# EAGLE board ESPCAT (EAGLE 8.0.1)
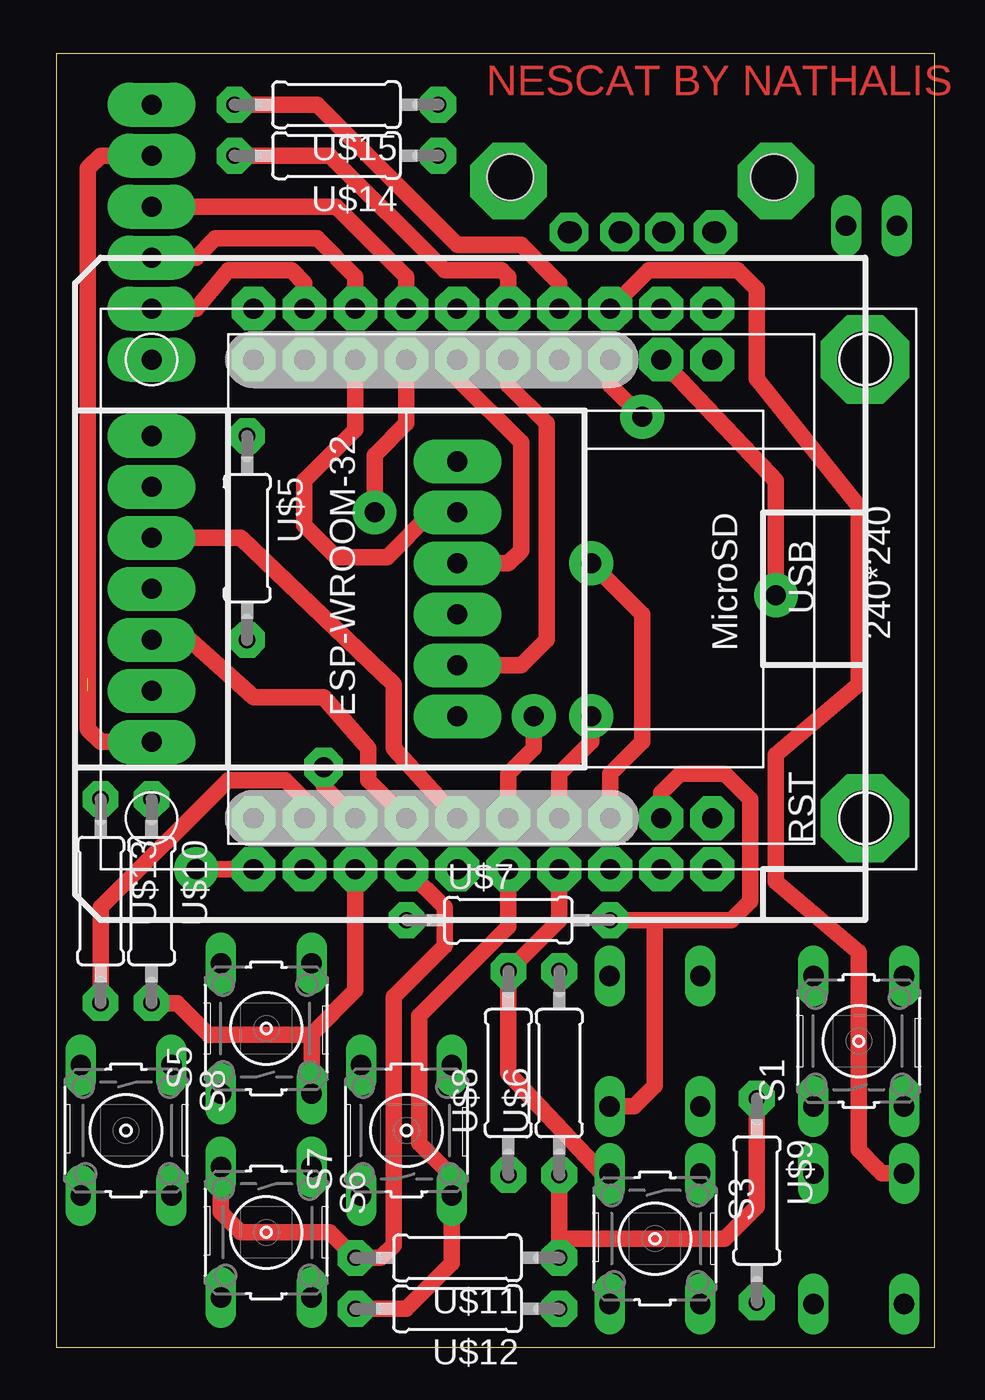
[diagram p0: board, top side]
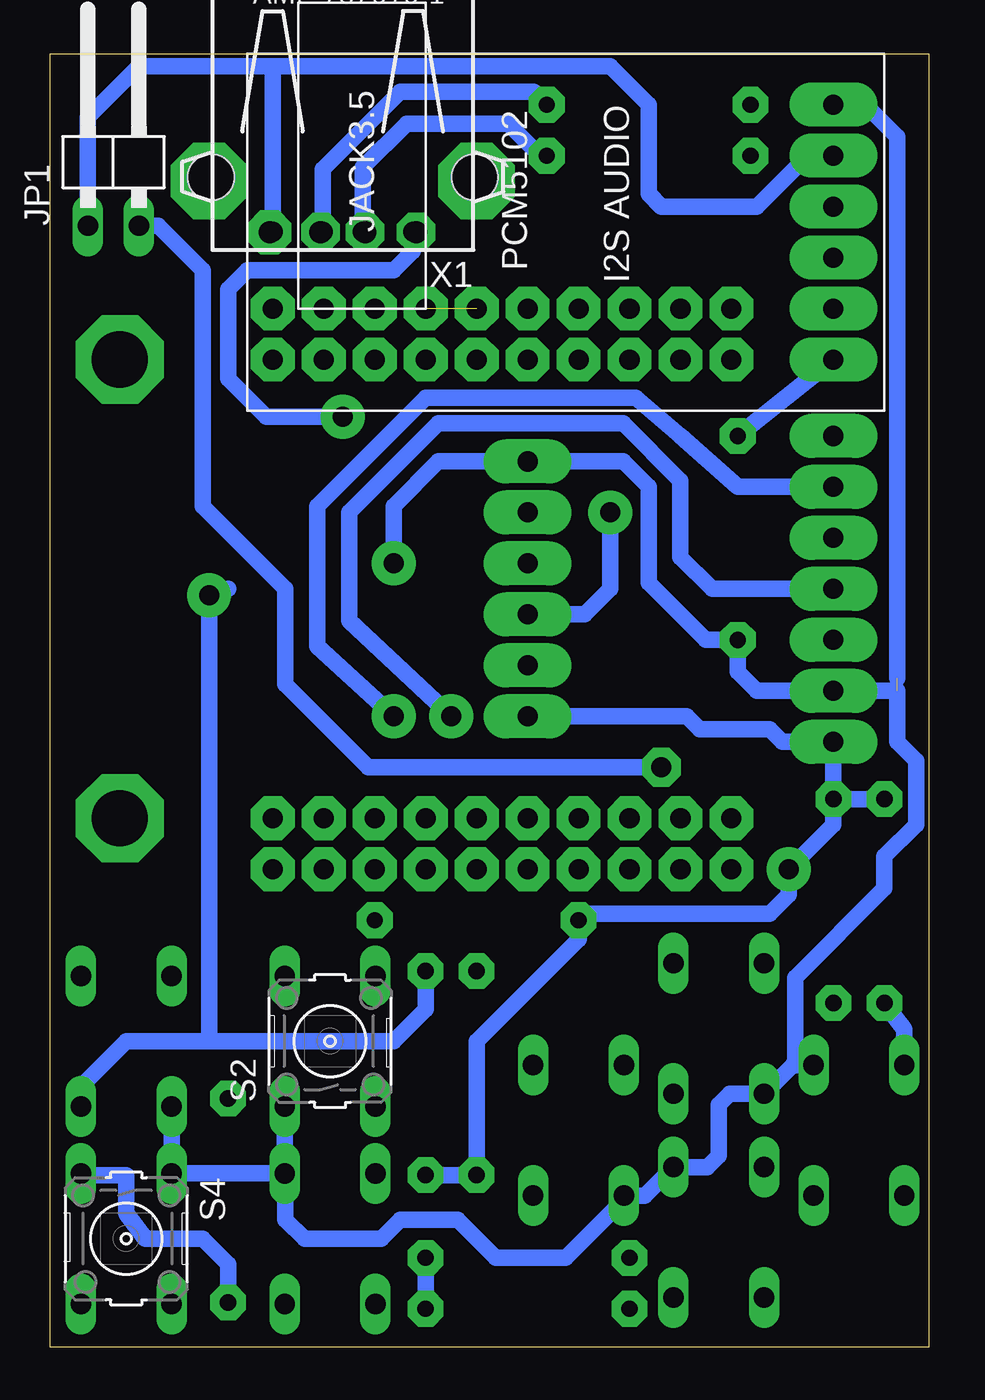
[diagram p1: board, bottom side, seen from below]

Size 43.8 x 64.44 mm. Coordinates in mm from the lower left corner, seen from the top.
Outline: 0,0 43.8,0 43.8,64.44 0,64.44 0,0
Copper layers (1*16): Top 0.035mm / dielectric 1.5mm / Bottom 0.035mm
Design rules "default": minimum track width 10mil, minimum drill 24mil, track to track 8mil, track to pad 8mil, pad to pad 8mil, via to via 8mil, smd to smd 8mil, copper to edge 40mil, drill to drill 8mil, minimum pad ring 10mil, minimum via ring 8mil, stop-mask expansion 4mil, vias tented up to drill 0mil, thermal gap 10mil

## Footprints (pad centres in the part's own frame; a part is rotated, then mirrored left to right if it is on the bottom)
1X02/90 = drill 1.016 long: 1 -1.27,-3.81; 2 1.27,-3.81
B3F-10XX = drill 1.016 long: 1 -3.251,2.261; 2 3.251,2.261; 3 -3.251,-2.261; 4 3.251,-2.261
WEMOS_D1_MINI_ESP32 = drill 1 pad 1.676 octagon: 3.3V -11.43,-10.16; CLK 13.97,-15.24; CMD -13.97,-15.24; GND1 11.43,-7.62; GND2 13.97,7.62; GND3 -13.97,7.62; IO0 13.97,-7.62; IO2 13.97,-10.16; IO4 13.97,-5.08; IO5 -11.43,-7.62; IO16 11.43,-5.08; IO17 11.43,-2.54; IO18 -11.43,0; IO19 -11.43,-2.54; IO21 11.43,0; IO22 11.43,2.54; IO23 -11.43,-5.08; IO25 13.97,2.54; IO26 -11.43,2.54; IO27 13.97,5.08; IO32 13.97,0; IO33 -13.97,-2.54; IO34 -13.97,-5.08; IO35 -13.97,0; NC1 -13.97,5.08; NC2 -13.97,-10.16; RST -11.43,7.62; RXD 11.43,5.08; SD0 11.43,-15.24; SD1 13.97,-12.7; SD2 -13.97,-12.7; SD3 -11.43,-15.24; SVN -13.97,2.54; SVP -11.43,5.08; TCK -11.43,-12.7; TD0 11.43,-12.7; TDI 13.97,-2.54; TMS -13.97,-7.62; TXD 11.43,7.62; VCC 11.43,-10.16
ST7789-1.3INCH = drill 1 pad 2.184 long: BLK -7.62,-19.05; DC -5.08,-19.05; GND 7.62,-19.05; RES -2.54,-19.05; SCL 2.54,-19.05; SDA 0,-19.05; VCC 5.08,-19.05
MICROSD-CARD-MODULE = drill 1 pad 2.184 long: 3V3 -6.35,-10.16; CLK 1.27,-10.16; CS -3.81,-10.16; GND 6.35,-10.16; MISO 3.81,-10.16; MOSI -1.27,-10.16
I2S-MODULE-PCM5102A-LITE = drill 1 pad 2.184 long: BCK -3.81,-13.335; DIN -1.27,-13.335; GND 3.81,-13.335; LCK 1.27,-13.335; SCK -6.35,-13.335; VIN 6.35,-13.335
R-0207/10H = drill 0.813 pad 1.778 octagon: 1 -5.08,0; 2 5.08,0
USB = drill 1: 1 -3.5,12.99; 2 -1,12.99; 3 1,12.99; 4 3.5,12.99 | hole 2.3: -6.57,10.28; 6.57,10.28

## Placement (x,y rotation side)
JP1  [1X02/90]  40.64,59.69 0 bottom
S1  START  [B3F-10XX]  40.01,15.24 90 top
S2  SEL  [B3F-10XX]  29.84,15.24 90 bottom
S3  B  [B3F-10XX]  29.84,5.4 270 top
S4  A  [B3F-10XX]  40.01,5.4 270 bottom
S5  UP  [B3F-10XX]  10.48,15.88 90 top
S6  DOWN  [B3F-10XX]  10.48,5.71 270 top
S7  RIGHT  [B3F-10XX]  17.46,10.79 90 top
S8  LEFT  [B3F-10XX]  3.49,10.79 270 top
U$1  WEMOS_D1_MINI_ESP32  [WEMOS_D1_MINI_ESP32]  17.46,37.78 90 top
U$2  ST7789-1.3INCH  [ST7789-1.3INCH]  23.81,37.78 270 top
U$3  MICROSD-CARD-MODULE  [MICROSD-CARD-MODULE]  30.16,37.78 270 top
U$4  I2S-MODULE-PCM5102A-LITE  [I2S-MODULE-PCM5102A-LITE]  18.1,55.56 90 bottom
U$5  [R-0207/10H]  9.53,40.32 270 top
U$6  [R-0207/10H]  25.08,13.65 90 top
U$7  [R-0207/10H]  22.54,21.27 0 top
U$8  [R-0207/10H]  22.54,13.65 90 top
U$9  [R-0207/10H]  34.92,7.3 270 top
U$10  [R-0207/10H]  4.76,22.23 270 top
U$11  [R-0207/10H]  20,4.45 180 top
U$12  [R-0207/10H]  20,1.91 180 top
U$13  [R-0207/10H]  2.22,22.23 270 top
U$14  [R-0207/10H]  13.97,59.37 180 top
U$15  [R-0207/10H]  13.97,61.91 180 top
X1  [USB]  29.21,68.58 180 bottom

## Library data of the parts
JP1 = pinhead
S1-S8 = switch-omron; MPN: B3F-1000; OC_FARNELL: 176432; OC_NEWARK: 36M3542
U$1 = wemos_D1_mini_ESP32
U$2 = ST7789-1.3INCH
U$3 = MICROSD-CARD-MODULE
U$4 = I2S-MODULE-PCM5102A
U$5-U$15 = NCX-LIB
X1 = con-amp

## Nets
N$3: U$1.IO32 U$4.LCK
N$5: U$4.SCK U$5.1
N$6: JP1.2 U$1.IO26
N$7: U$14.1 X1.2
N$8: U$15.1 X1.3
N$10: U$1.VCC X1.1
N$12: S4.3 U$1.IO2 U$9.2
N$13: U$1.IO27 U$4.BCK
N$15: S1.1 S2.1 S3.1 S4.1 S5.1 S6.1 S7.1 S8.1 U$1.3.3V U$2.VCC U$3.3V3 U$4.VIN U$5.2
N$17: U$1.IO25 U$4.DIN
N$18: U$1.IO18 U$2.SCL
N$19: U$1.IO23 U$2.SDA
N$20: U$1.IO19 U$2.RES
N$21: S5.3 U$1.SVN U$10.2
N$22: S2.3 U$1.TCK U$7.2
N$24: S3.3 U$1.TMS U$8.2
N$63: U$1.IO5 U$2.DC
N$64: U$1.IO22 U$3.CS
N$65: U$1.IO21 U$3.CLK
N$66: S6.3 U$1.IO35 U$11.2
N$67: U$1.IO16 U$3.MISO
N$68: S1.3 U$1.TD0 U$6.2
N$69: U$1.IO17 U$3.MOSI
N$70: U$1.IO4 U$14.2
N$71: U$1.IO0 U$15.2
N$72: S8.3 U$1.SVP U$13.2
N$73: S7.3 U$1.IO34 U$12.2
N$77: JP1.1 U$1.GND3 U$2.GND U$3.GND U$4.GND U$6.1 U$7.1 U$8.1 U$9.1 U$10.1 U$11.1 U$12.1 U$13.1 X1.4

## Tracks (layer width: path | path; a pad name or v marks a point on that pad's centre or on a via)
N$1  (via drill 2 pad 3.81)
  other vias: 35.88,58.1
N$2  (via drill 1.1 pad 1.93)
  other vias: 25.56,55.56
N$3
  Top 0.813: U$1.IO32 17.46,53.34 13.97,56.83 U$4.LCK
N$4  (via drill 1.1 pad 1.93)
  other vias: 28.1,55.56
N$5
  Bottom 0.813: U$5.1 U$4.SCK
N$6  (via drill 1 pad 1.93)
  Top 0.813: v13.34,28.89 13.34,27.94 U$1.IO26
  Bottom 0.813: JP1.2 38.42,55.88 36.2,53.66 36.2,41.91 32.07,37.78 32.07,33.02 27.94,28.89 v13.34,28.89
N$7
  Bottom 0.813: U$14.1 19.37,59.37 20.95,60.96 26.04,60.96 28.21,58.78 X1.2
N$8
  Bottom 0.813: U$15.1 19.68,62.55 26.35,62.55 30.21,58.69 X1.3
N$9  (via drill 1.1 pad 2.18)
  other vias: 32.86,55.56
N$10  (via drill 1 pad 2.18)
  Top 0.813: v29.21,46.35 27.62,47.94 U$1.VCC
  Bottom 0.813: X1.1 25.71,55.57 25.72,54.61 26.67,53.66 33.97,53.66 34.92,52.7 34.92,48.26 33.02,46.35 v29.21,46.35
N$11  (via drill 1 pad 2.18)
  other vias: 30.16,26.35
N$12
  Top 0.813: U$1.IO2 29.53,53.66 33.97,53.66 34.92,52.7 34.92,48.26 40.01,41.91 40.01,33.02 35.88,29.53 35.88,23.18 40.01,19.68 40.01,9.84 40.92,8.89 41.16,8.65 S4.3
  Bottom 0.813: U$9.2 34.92,4.13 36.2,5.4 39.05,5.4 40.01,6.67 40.01,8.57 42.19,8.57 S4.3
N$13
  Top 0.813: U$1.IO27 12.38,53.02 11.75,53.66 8.57,53.66 6.99,51.75 U$4.BCK
N$14  (via drill 1 pad 2.18)
  other vias: 32.7,23.81
N$15  (via drill 1 pad 2.18)  (1 unrouted)
  Top 0.813: U$1.3.3V 27.62,28.57 29.21,30.16 29.21,36.51 v26.67,39.05
  Bottom 0.813: 6.67,14.05 S8.1 6.39,14.01 | 6.67,14.05 6.79,14.05 S5.1 9.92,12.62 10.48,12.06 10.48,9.53 11.04,8.97 S6.1 14.16,7.54 S7.1 15.2,7.34 18.1,4.45 21.59,4.45 23.5,6.35 26.35,6.35 27.3,5.4 31.11,5.4 32.07,6.35 32.07,8.61 S3.1 | S3.1 S2.1 | U$4.VIN 3.17,61.91 1.59,60.33 1.59,33.34 | v26.67,39.05 26.67,41.91 24.45,44.13 U$3.3V3 15.24,44.13 13.97,42.86 13.97,38.1 11.11,35.24 U$5.2 9.53,33.66 8.57,32.7 U$2.VCC 1.59,32.7 1.59,30.16 0.64,29.21 0.64,26.04 2.22,24.45 2.22,22.86 6.67,18.41 6.67,14.05 | S3.1 S4.1 S1.1
N$16  (via drill 1 pad 2.18)
  other vias: 32.7,26.35
N$17
  Top 0.813: 4.45,54.29 U$4.DIN 6.99,54.29 7.94,55.24 13.02,55.24 14.92,53.34 U$1.IO25
N$18
  Top 0.813: U$1.IO18 15.56,28.26 15.56,29.84 13.34,32.38 9.84,32.38 6.67,35.24 U$2.SCL
N$19  (via drill 1 pad 2.18)
  Top 0.813: v23.81,31.43 23.81,29.84 22.54,28.57 U$1.IO23
  Bottom 0.813: U$2.SDA 10.79,37.78 12.38,39.37 12.38,43.18 15.24,46.04 24.45,46.04 28.89,41.59 28.89,36.2 v23.81,31.43
N$20
  Top 0.813: U$2.RES 9.21,40.32 16.83,33.02 16.83,29.84 U$1.IO19
N$21
  Top 0.813: 12.74,15.6 S5.3 | 12.74,15.6 14.92,17.78 U$1.SVN | U$10.2 6.03,17.14 7.62,15.56 12.7,15.56 12.74,15.6
N$22
  Top 0.813: 29.84,21.27 U$7.2 | 29.84,21.27 33.66,21.27 34.61,22.23 34.61,27.3 33.34,28.57 31.11,28.57 30.16,27.62 U$1.TCK | S2.3 28.82,11.99 29.84,13.02 29.84,21.27
N$23  (via drill 1.1 pad 1.93)
  other vias: 30.32,55.56
N$24
  Top 0.813: S3.3 27.23,8.65 22.54,13.65 U$8.2 25.08,21.27 U$1.TMS
N$25  (via drill 1 pad 2.18)
  other vias: 30.16,23.81
N$26  (via drill 1 pad 2.18)
  other vias: 30.16,49.21
N$27  (via drill 1 pad 2.18)
  other vias: 9.84,49.21
N$28  (via drill 1 pad 2.18)
  other vias: 9.84,51.75
N$29  (via drill 1 pad 2.18)
  other vias: 12.38,49.21
N$30  (via drill 1 pad 2.18)
  other vias: 12.38,51.75
N$31  (via drill 1 pad 2.18)
  other vias: 14.92,49.21
N$32  (via drill 1 pad 2.18)
  other vias: 14.92,51.75
N$33  (via drill 1 pad 2.18)
  other vias: 17.46,49.21
N$34  (via drill 1 pad 2.18)
  other vias: 17.46,51.75
N$35  (via drill 1 pad 2.18)
  other vias: 20,49.21
N$36  (via drill 1 pad 2.18)
  other vias: 20,51.75
N$37  (via drill 1 pad 2.18)
  other vias: 22.54,49.21
N$39  (via drill 1 pad 2.18)
  other vias: 25.08,49.21
N$40  (via drill 1 pad 2.18)  (1 unrouted)
  other vias: 25.08,51.75 22.54,51.75
N$41  (via drill 1 pad 2.18)
  other vias: 27.62,49.21
N$42  (via drill 1 pad 2.18)
  other vias: 27.62,51.75
N$43  (via drill 1 pad 2.18)
  other vias: 32.7,49.21
N$44  (via drill 1 pad 2.18)
  other vias: 32.7,51.75
N$45  (via drill 1 pad 2.18)
  other vias: 30.16,51.75
N$47  (via drill 1 pad 2.18)
  other vias: 9.84,26.35
N$48  (via drill 1 pad 2.18)
  other vias: 9.84,23.81
N$49  (via drill 1 pad 2.18)
  other vias: 12.38,23.81
N$50  (via drill 1 pad 2.18)
  other vias: 12.38,26.35
N$51  (via drill 1 pad 2.18)
  other vias: 14.92,23.81
N$52  (via drill 1 pad 2.18)
  other vias: 14.92,26.35
N$53  (via drill 1 pad 2.18)
  other vias: 17.46,23.81
N$54  (via drill 1 pad 2.18)
  other vias: 17.46,26.35
N$55  (via drill 1 pad 2.18)
  other vias: 20,23.81
N$56  (via drill 1 pad 2.18)
  other vias: 20,26.35
N$57  (via drill 1 pad 2.18)
  other vias: 22.54,23.81
N$58  (via drill 1 pad 2.18)
  other vias: 22.54,26.35
N$59  (via drill 1 pad 2.18)
  other vias: 25.08,23.81
N$60  (via drill 1 pad 2.18)
  other vias: 25.08,26.35
N$61  (via drill 1 pad 2.18)
  other vias: 27.62,23.81
N$62  (via drill 1 pad 2.18)
  other vias: 27.62,26.35
N$63  (via drill 1 pad 2.18)
  Top 0.813: v26.67,31.43 26.67,30.16 25.08,28.57 U$1.IO5
  Bottom 0.813: U$2.DC 9.53,42.86 12.38,45.4 14.61,47.31 25.08,47.31 30.48,41.91 30.48,34.92 v26.67,31.43
N$64
  Top 0.813: U$3.CS 18.73,41.59 16.51,39.37 13.97,39.37 12.38,40.96 12.38,43.18 14.92,45.72 U$1.IO22
N$65  (via drill 1 pad 2.18)
  Top 0.813: v15.88,41.59 15.88,44.45 17.46,46.04 U$1.IO21
  Bottom 0.813: U$3.CLK 17.14,36.51 15.88,37.78 v15.88,41.59
N$66
  Top 0.813: U$1.IO35 19.37,21.91 19.37,20 16.83,17.46 16.83,5.08 16.19,4.45 U$11.2 13.65,5.71 9.21,5.71 8.22,6.71 S6.3
N$67
  Top 0.813: U$3.MISO 23.18,33.97 24.45,35.24 24.45,46.04 22.54,47.94 U$1.IO16
N$68  (via drill 1 pad 2.18)
  Top 0.813: U$1.TD0 35.56,43.5 35.88,43.18 v35.88,37.47
  Bottom 0.813: U$6.2 25.08,16.83 26.67,15.24 35.88,15.24 | 35.88,15.24 v35.88,37.47 34.92,37.78 | 35.88,15.24 40.01,15.24 42.27,12.98 S1.3
N$69
  Top 0.813: U$3.MOSI 22.54,39.05 23.18,39.69 23.18,45.09 20,48.26 U$1.IO17
N$70
  Top 0.813: U$14.2 13.65,59.37 19.37,53.66 22.23,53.66 22.54,53.34 U$1.IO4
N$71
  Top 0.813: U$15.2 13.02,61.91 20,54.93 23.18,54.93 25.08,53.02 U$1.IO0
N$72
  Top 0.813: U$13.2 2.22,21.91 8.57,28.26 11.43,28.26 12.38,27.3 U$1.SVP
  Bottom 0.813: U$13.2 1.23,15.84 S8.3
N$73
  Top 0.813: U$12.2 17.46,1.91 19.72,4.17 S7.3 19.72,8.53 18.1,10.16 18.1,16.51 22.54,20.95 U$1.IO34
N$74  (via drill 2.8 pad 4.4)
  other vias: 40.32,49.21
N$75  (via drill 2.8 pad 4.4)
  other vias: 40.32,26.35
N$76  (via drill 2 pad 3.81)
  other vias: 22.54,58.1
N$77  (via drill 1 pad 2.18)
  Top 0.813: U$9.1 34.92,6.99 33.34,5.4 25.08,5.4 | 25.08,5.4 U$6.1 | U$11.1 25.08,5.4 | v6.99,23.81 U$1.GND3 | U$2.GND 2.22,30.16 1.59,30.8 1.59,58.74 2.22,59.37 U$4.GND
  Bottom 0.813: U$3.GND 12.06,31.43 11.43,30.8 7.94,30.8 7.3,30.16 U$2.GND U$10.1 | U$12.1 U$11.1 | U$13.1 U$10.1 | U$6.1 U$8.1 22.54,15.24 17.46,20.32 U$7.1 17.14,21.59 7.94,21.59 6.99,22.54 v6.99,23.81 4.76,26.04 U$10.1 | U$4.GND 6.03,59.37 8.57,56.83 13.34,56.83 13.97,57.47 13.97,61.91 15.88,63.82 32.7,63.82 | 32.7,63.82 32.71,63.81 X1.4 | JP1.1 41.91,61.28 39.37,63.82 32.7,63.82

## Text on the board
Top: NESCAT BY NATHALIS